# Altium PCB project3_PushButtonLedToggle.PcbDoc
Units mil, origin at the board's own origin, x right, y up, seen from the top; angles counter-clockwise.
Board outline 1700 x 1600 mil, 2 copper layers (Top Layer, Bottom Layer); 9 components, 7 nets, 32 pads, 2 vias.
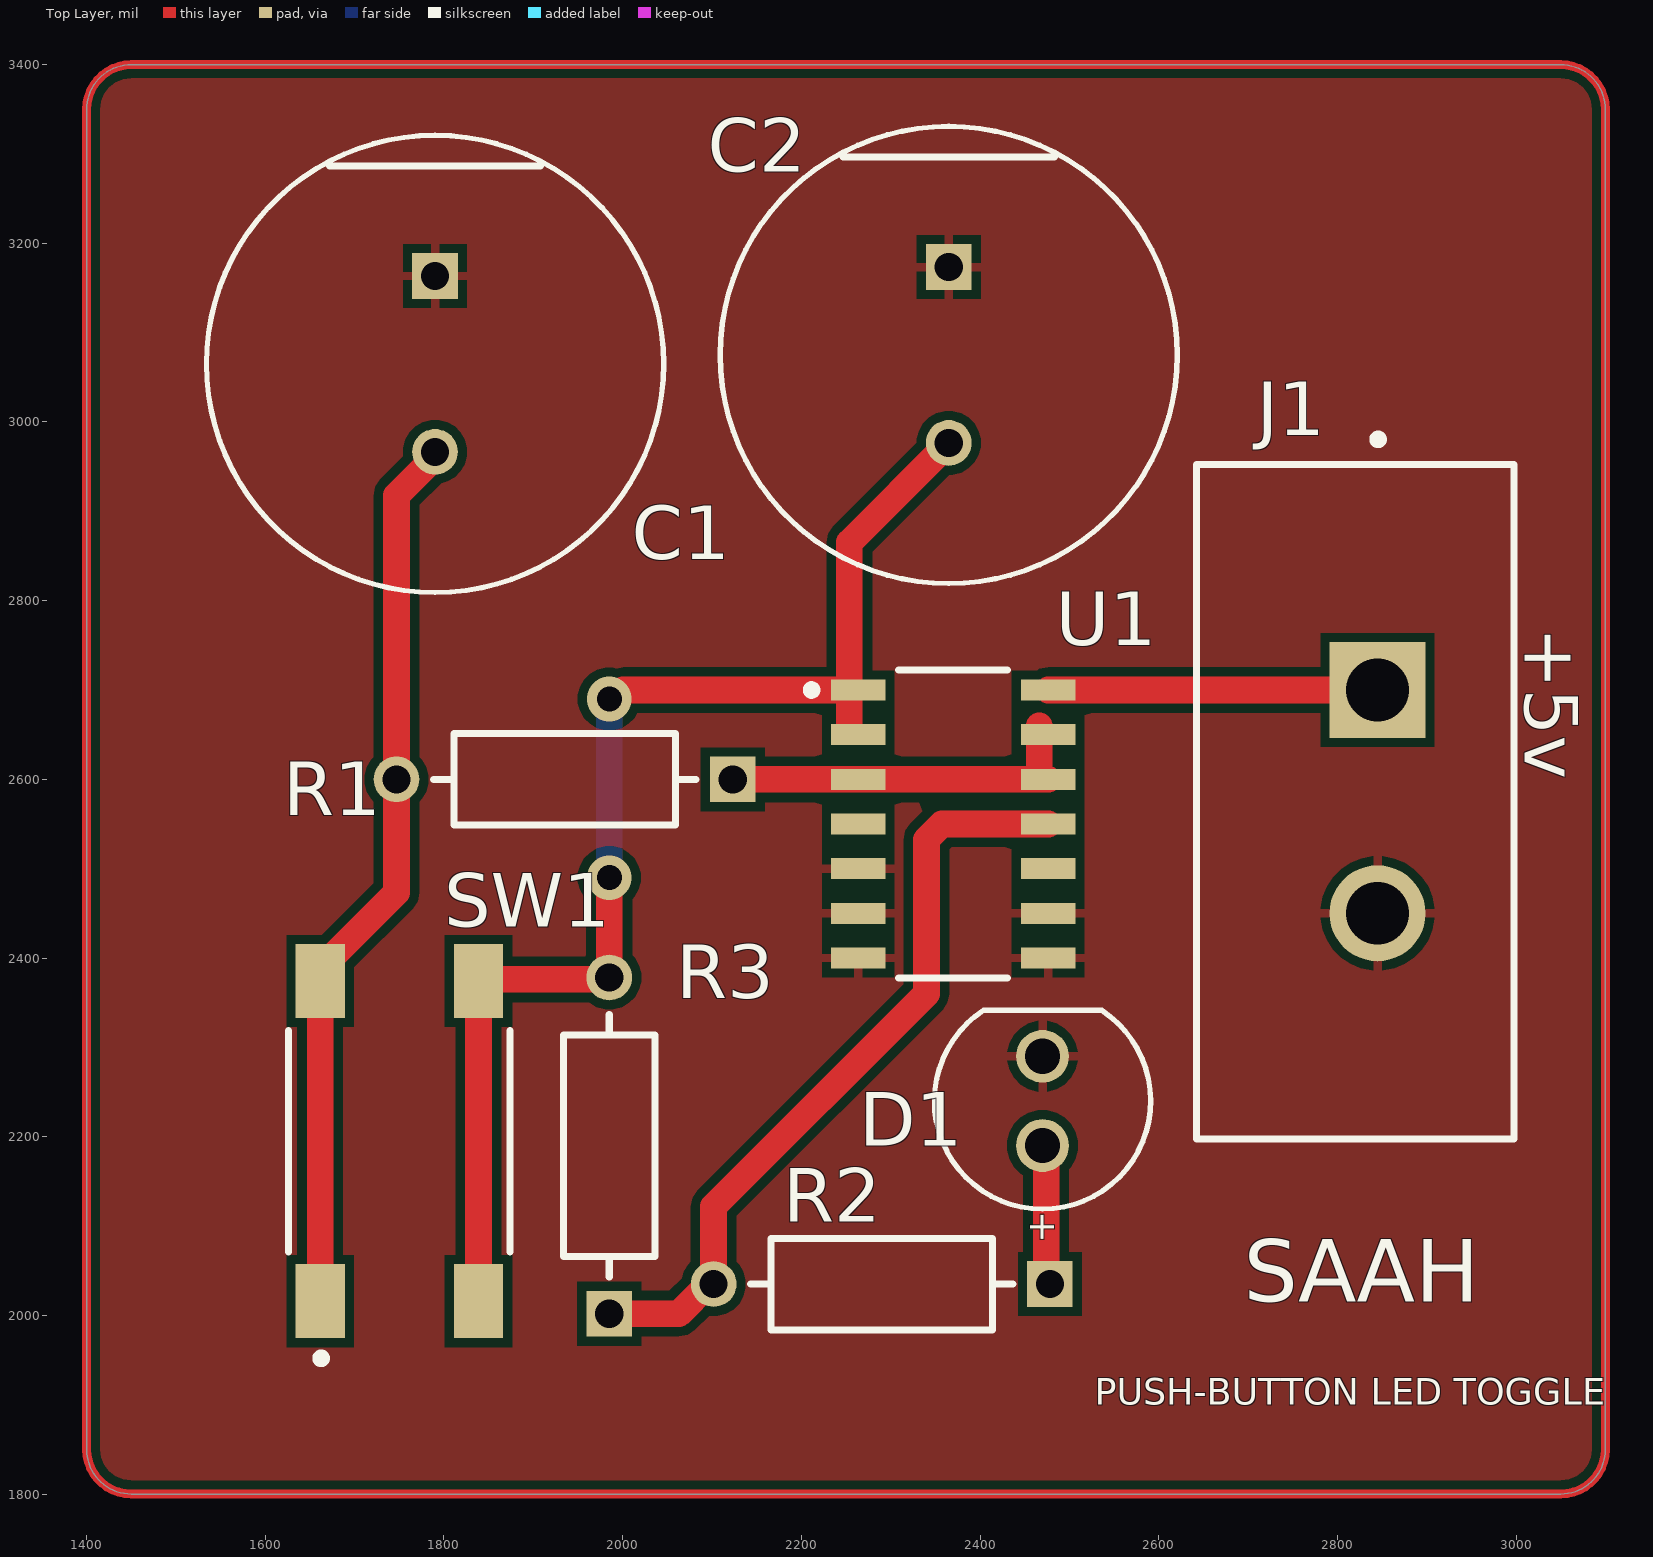
[diagram p0: Top Layer view]
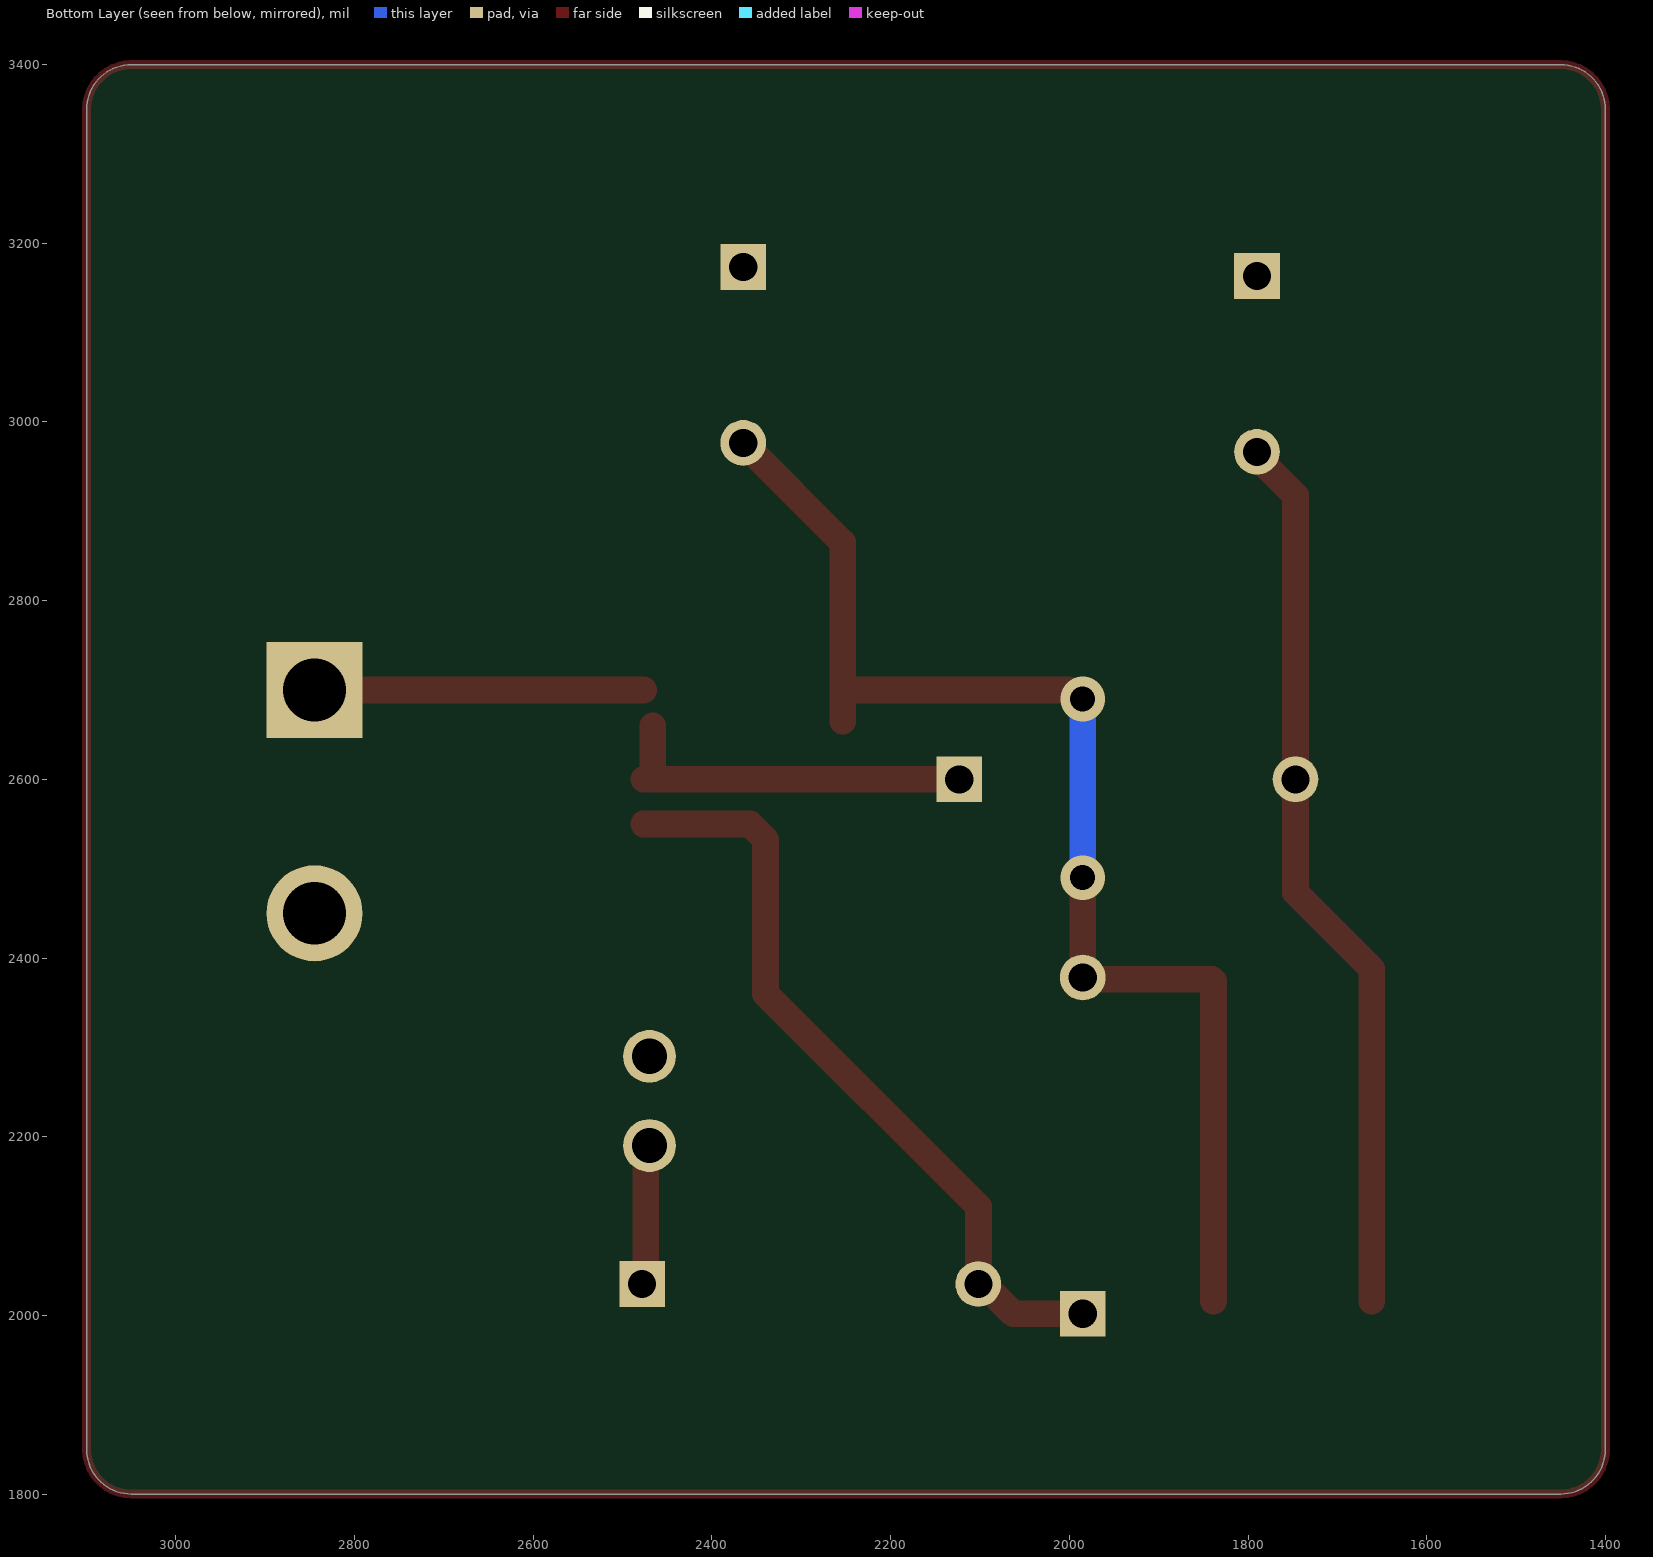
[diagram p1: Bottom Layer view, seen from below]
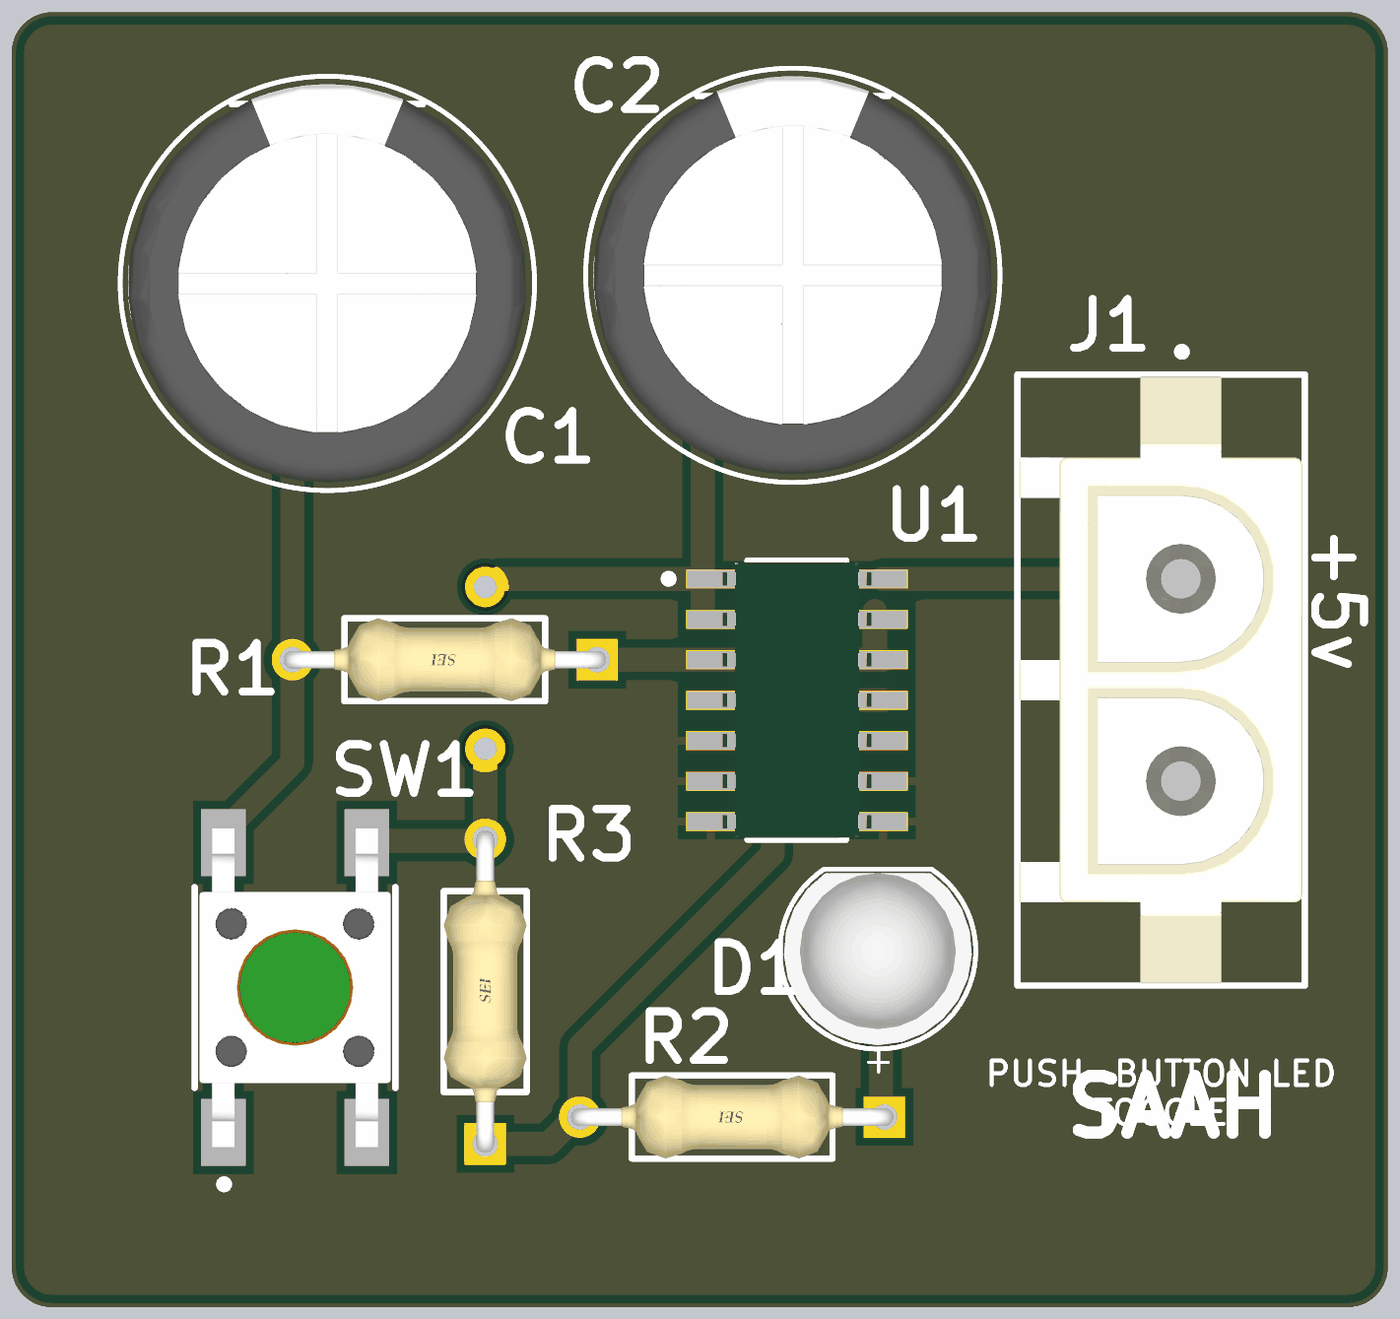
[diagram p2: 3D render of the assembled board from above, using the file's embedded part models]

## Layer stack, top to bottom
Top Solder: solder mask 0.4, Solder Resist, Dk 3.5
Top Layer: signal copper 1.4
Dielectric 1: dielectric 12.6, FR-4, Dk 4.8
Bottom Layer: signal copper 1.4
Bottom Solder: solder mask 0.4, Solder Resist, Dk 3.5

## Board outline
1400,1850 1400,3350 cw(c1450,3350) 1450,3400 3050,3400 cw(c3050,3350) 3100,3350 3100,1850 cw(c3050,1850) 3050,1800 1450,1800 cw(c1450,1850)

## Design rules (kind name [scope] priority, off if disabled: settings)
Clearance [All] p1: gap=10 ignorepadtopadclearanceinfootprint=FALSE
PolygonConnect [All] p1: connectstyle=Relief reliefconductorwidth=10 reliefentries=4 polygonreliefangle="90 Angle" airgapwidth=10
RoutingVias [All] p1: holewidth=28 width=50 viastyle="Through Hole" minholewidth=28 minwidth=50 maxholewidth=28 maxwidth=50
SolderMaskExpansion [All] p1: expansion=4 istentingtop=FALSE
SupplyNets "Schematic Supply Nets" [InNet('GND')] p1: voltage=0.000
Width [All] p1: maxlimit=40 minlimit=10 preferedwidth=30 minimp=50.000000 maximp=50.000000 favimp=50.000000
30 further rules are at their usual default settings.

## Components (designator, comment, footprint, x,y, rotation, side; value= is the part's Value field where it differs from the comment)
C1 "10u" FP-RAD-TH-D_12_5_0_5-L_20-MFG 1790,3065 r270 top
C2 "10n" FP-RAD-TH-D_12_5_0_5-L_20-MFG 2365,3075 r270 top
D1 "LED" WL-TMRC_D5.9H8.7 2470.01,2239.99 r90 top
J1 "350428-1" FP-350428-1-MFG 2820,2575 r270 top
R1 "100k" FP-CF14-MFG 1935,2600 r180 top
R2 "1k" FP-CF14-MFG 2290,2035 r180 top
R3 "100k" FP-CF14-MFG 1985,2190 r90 top
SW1 "1977223-4" FP-1977223-4-MFG 1750,2195 r180 top
U1 "CD4011BM" FP-D0014A-MFG 2370,2550 r0 top

## Footprints (in the part's own frame and the unit in brackets; to place one, negate y for a bottom-side part, rotate by r counter-clockwise, add the part's x,y. Pads: shape width x height; smd on the part's side, far side on the other; paste and mask are expansions set on the pad)
FP-350428-1-MFG [mm]
  rect 2.73x2.73 hole 1.78 paste-2539.97 mask+0: 1(-3.175,0.635)
  round 2.73 hole 1.78 paste-2539.97 mask+0: 2(3.175,0.635)
  silkscreen extent -10.42,-4.51 9.59,4.51, body extent -9.69,-4.61 9.69,4.61, height 0.25
FP-1977223-4-MFG [mm]
  rect 1.4x2.1 smd paste+0 mask+0: 1(2.25,4.55) 2(2.25,-4.55) 3(-2.25,4.55) 4(-2.25,-4.55)
  silkscreen extent -3.15,-3.15 3.15,6.3, body extent -3.25,-5.7 3.25,5.7, height 0.25
FP-CF14-MFG [mm]
  rect 1.3x1.3 hole 0.8 paste-2539.97 mask+0: 1(-4.78,0)
  round 1.3 hole 0.8 paste-2539.97 mask+0: 2(4.78,0)
  silkscreen extent -3.73,-1.3 3.73,1.3, body extent -5.53,-1.4 5.53,1.4, height 0.25
FP-D0014A-MFG [mm]
  rect 1.55x0.6 smd paste-1000 mask+0: 1(-2.7,3.81) 2(-2.7,2.54) 3(-2.7,1.27) 4(-2.7,0) 5(-2.7,-1.27) 6(-2.7,-2.54) 7(-2.7,-3.81) 8(2.7,-3.81) 9(2.7,-2.54) 10(2.7,-1.27) 11(2.7,0) 12(2.7,1.27) 13(2.7,2.54) 14(2.7,3.81)
  silkscreen extent -4.15,-4.38 1.55,4.38, body extent -3.57,-4.62 3.57,4.62, height 0.25
FP-RAD-TH-D_12_5_0_5-L_20-MFG [mm]
  rect 1.3x1.3 hole 0.8 paste-2539.97 mask+0: 1(-2.5,0)
  round 1.3 hole 0.8 paste-2539.97 mask+0: 2(2.5,0)
  silkscreen extent -6.5,-6.5 6.5,6.5, body extent -6.6,-6.6 6.6,6.6, height 0.25
WL-TMRC_D5.9H8.7 [mm] "THT Mono-color Round Color LED, 2-leads"
  round 1.5 hole 1: 1(-1.27,0) 2(1.27,0)
  silkscreen extent -3.07,-3.07 2.58,3.08, body extent -2.95,-2.95 2.45,2.95, height 9.2

## Part data
C1 C2: library part CMP-05427-000380-1, "Aluminum Electrolytic Capacitors (Radial Lead Type) 10uF ±20% 450V", Capacitance=10uF, Case/Package=Radial, Leakage Current=280uA, Max Operating Temperature=105°C, Min Operating Temperature=-25°C, Package Quantity=200, Ripple Current=490mA, Tolerance=20%, Voltage=450V, Construction=RADIAL, Diameter=12.5mm, Dissipation Factor=0.24%, Height=20mm, Height - Seated (Max)=0.787inch, Lead Diameter=0.6mm, Lead Free="Lead Free", Lead Pitch=5mm, Length=20mm, Life (Hours)=10000Hour, Mount="Through Hole", Packaging=Bulk, Radiation Hardening=No, REACH SVHC="No SVHC", RoHS Compliant=Yes, Series=EE, Termination=Radial, Voltage Rating=450V, Voltage Rating (DC)=450V
D1: library part CMP-03913-71241449-1, "151051SS04000 WL-TMRC THT Mono-color Round Color", Forward Current=100mA, Forward Voltage=2.1V, Max Operating Temperature=85°C, Max Reverse Voltage (DC)=5V, Min Operating Temperature=-40°C, Dominant Wavelength=635nm, Height=8.6mm, Length=5mm, Luminous Intensity=250mcd, Mount="Through Hole", NexarPartId=71241449, Packaging=Bulk, Peak Wavelength=640nm, RoHS=Compliant, Viewing Angle=40°, Wavelength=635nm, Width=5mm
J1: library part CMP-03369-000080-1, "CONN HEADER VERT 2POS 6.35MM", Current Rating=12A, Manufacturer="TE Connectivity", Temperature="-40°C to +105°C", Temperature Range High=+105°C, Temperature Range Low=-40°C, Voltage Rating=600V, Automotive=No, Category=Conn, ComponentLink2Description=Datasheet, ComponentLink2URL=https://www.te.com/commerce/DocumentDelivery/DDEController?Action=showdoc&DocId=Customer+Drawing%7F350428%7FY2%7Fpdf%7FEnglish%7FENG_CD_350428_Y2.pdf%7F350428-1, Conn Gender=Male, Conn Orientation=Vertical, Contact Material=Gold,Nickel, Device Class L1=Connectors, Device Class L2="Headers and Wire Housings", Device Class L3=unset, Digikey Description="CONN HEADER VERT 2POS 6.35MM", Height=14.99mm, Lead Free=Yes, Manufacturer Part Number=350428-1, Mouser Description="Connector, Soft Shell; Universal MATE-N-LOK; 2; Nylon; Natural; 19 A; 600 VAC", Number Of Contacts=2, Number Of Rows=1, Octopart=https://octopart.com/350428-1-te+connectivity-46505355, Package=350428-1, Pitch=6.35mm, RoHS=TRUE, Standoff Height=0.63mm
R1 R2 R3: library part CMP-26528-000003-1, "RES 7.5K OHM 1/4W 5% AXIAL", Case/Package=Axial, Max Operating Temperature=155°C, Max Power Dissipation=250mW, Min Operating Temperature=-55°C, Resistance=7.5kR, Resistor Type="Carbon Film", Temperature Coefficient=-400ppm/°C, Tolerance=5%, Contact Plating=Tin, Diameter=2.3mm, Features="Flame Retardant Coating", Lead Free="Lead Free", Length=0.256inch, Mount="Through Hole", Number of Terminations=2, Packaging="Tape and Reel", Power Rating=250mW, Radiation Hardening=No, RoHS Compliant=Yes, Series=CF
SW1: library part CMP-03407-000020-1, "SWITCH TACTILE SPST-NO 0.05A 12V", RoHS Compliant=Yes
U1: library part CMP-1627-00066-3, "IC GATE NAND 4CH 2-INP 14SOIC", Ambient Temperature Range High=+125°C, Ambient Temperature Range Low=-55°C, Manufacturer="Texas Instruments", Max Supply Voltage=18V, Min Supply Voltage=3V, Package=D0014A, Quiescent Current=0.01-0.02uA, Temperature="-55°C to +125°C", Automotive=No, Category=IC, ComponentLink2Description=Datasheet, ComponentLink2URL=http://www.ti.com/lit/ds/symlink/cd4011b.pdf, Device Class L1="Integrated Circuits (ICs)", Device Class L2="Logic ICs", Device Class L3="Logic Gates", Digikey Description="IC GATE NAND 4CH 2-INP 14SOIC", Height=1.75mm, Lead Free=Yes, Logic Function Desc=NAND, Manufacturer Part Number=CD4011BM, Mouser Description="CMOS Quad 2-Input NAND Gate 14-SOIC -55 to 125", Number Of Circuits=4, Number Of Inputs=2, Number Of Outputs=1, Octopart=https://octopart.com/cd4011bm-texas+instruments-16544, Propagation Delay=45ns, RoHS=TRUE, Standoff Height=0.1mm, Temperature Range High=+125°C, Temperature Range Low=-55°C

## Via types
v1: diameter 50, hole 28, Top Layer to Bottom Layer, 2 vias

## Nets (pads, with @x,y where several pads share a name; then routed paths per layer and width w, separated by ;. In a path a pad name is that pad's centre, name@x,y a point inside that pad or via, vN(x,y) a via of type N, cw(c..) or ccw(c..) an arc to the next point about the centre after c; other vN are vias at no path point)
GND: C1.1 C2.1 D1.2 J1.2 U1.5 U1.6 U1.7 U1.8 U1.9
NetC1_2: C1.2 R1.2 SW1.1 SW1.2 | length 1004
  Top Layer w30: SW1.1 SW1.2 1661.42,2387.91 1746.81,2473.31 R1.2 1746.81,2917.65 1790,2960.84 C1.2
NetC2_2: C2.2 R3.2 SW1.3 SW1.4 U1.1 U1.2 | length 1443.2
  Top Layer w30: SW1.3 SW1.4 1840.61,2376.16 1982.97,2376.16 R3.2 v1(1985,2490) ; v1(1985,2690) 1990.41,2690 2000.41,2700 U1.1@2248.19,2700 ; 2253.7,2665 2253.7,2865.28 C2.2
  Bottom Layer w30: v1(1985,2490) v1(1985,2690)
NetD1_1: D1.1 R2.1 | length 158.4
  Top Layer w30: D1.1 2474.09,2185.91 2474.09,2039.09 R2.1
NetJ1_1: J1.1 U1.14 | length 368.7
  Top Layer w30: U1.14 J1.1
NetR1_1: R1.1 U1.3 U1.12 U1.13 | length 398.1
  Top Layer w30: R1.1 U1.3 U1.12 ; 2466.3,2615 U1.13@2466.3,2660
NetR2_2: R2.2 R3.1 U1.11 | length 870.2
  Top Layer w30: R3.1 2062.89,2001.81 2096.08,2035 R2.2 2101.81,2121.81 2340,2360 2340,2532.43 2357.57,2550 U1.11
pads on no net: U1.4 U1.10
copper on no net: | length 6514.2
  Top Layer w10: 1400,1850 ccw(c1450,1850) 1450,1800 3050,1800 ccw(c3050,1850) 3100,1850 3100,3350 ccw(c3050,3350) 3050,3400 1450,3400 ccw(c1450,3350) 1400,3350 1400,3200 1400,1850

## Polygon pours and split planes (outlines as drawn)
GND on Top Layer "GND_L01_P000" (solid, pour order 0): 1400,1850 1400,3350 cw(c1450,3350) 1450,3400 3050,3400 cw(c3050,3350) 3100,3350 3100,1850 cw(c3050,1850) 3050,1800 1450,1800 cw(c1450,1850)

## Silkscreen, mask and mechanical layers (free items; w line width, h text height)
Top Overlay:
  text "+5v" at 3010,2770 h60 r270
  text "SAAH" at 2695,2015 h70
  text "PUSH-BUTTON LED TOGGLE" at 2528.37,1900 h30

## Text inside footprints (layer, text, board x,y; h text height)
D1: Top Overlay "+" at 2483,2080.54 h31.5 r90